# Altium PCB ALCT_MEZ_LX150T.PcbDoc (part 3 of 9)
Units mil, origin at the board's own origin, x right, y up, seen from the top; angles counter-clockwise.
Board outline 4101.98 x 5875.01 mil, 12 copper layers (Top Layer, Mid-Layer 1, +3V3, Mid-Layer 2, +1V2, Mid-Layer 4, +2V5, Mid-Layer 5, GND1, Mid-Layer 7, GND2, Bottom Layer), stack 64.7 mil thick; 378 components, 616 nets, 2492 pads, 1686 vias.
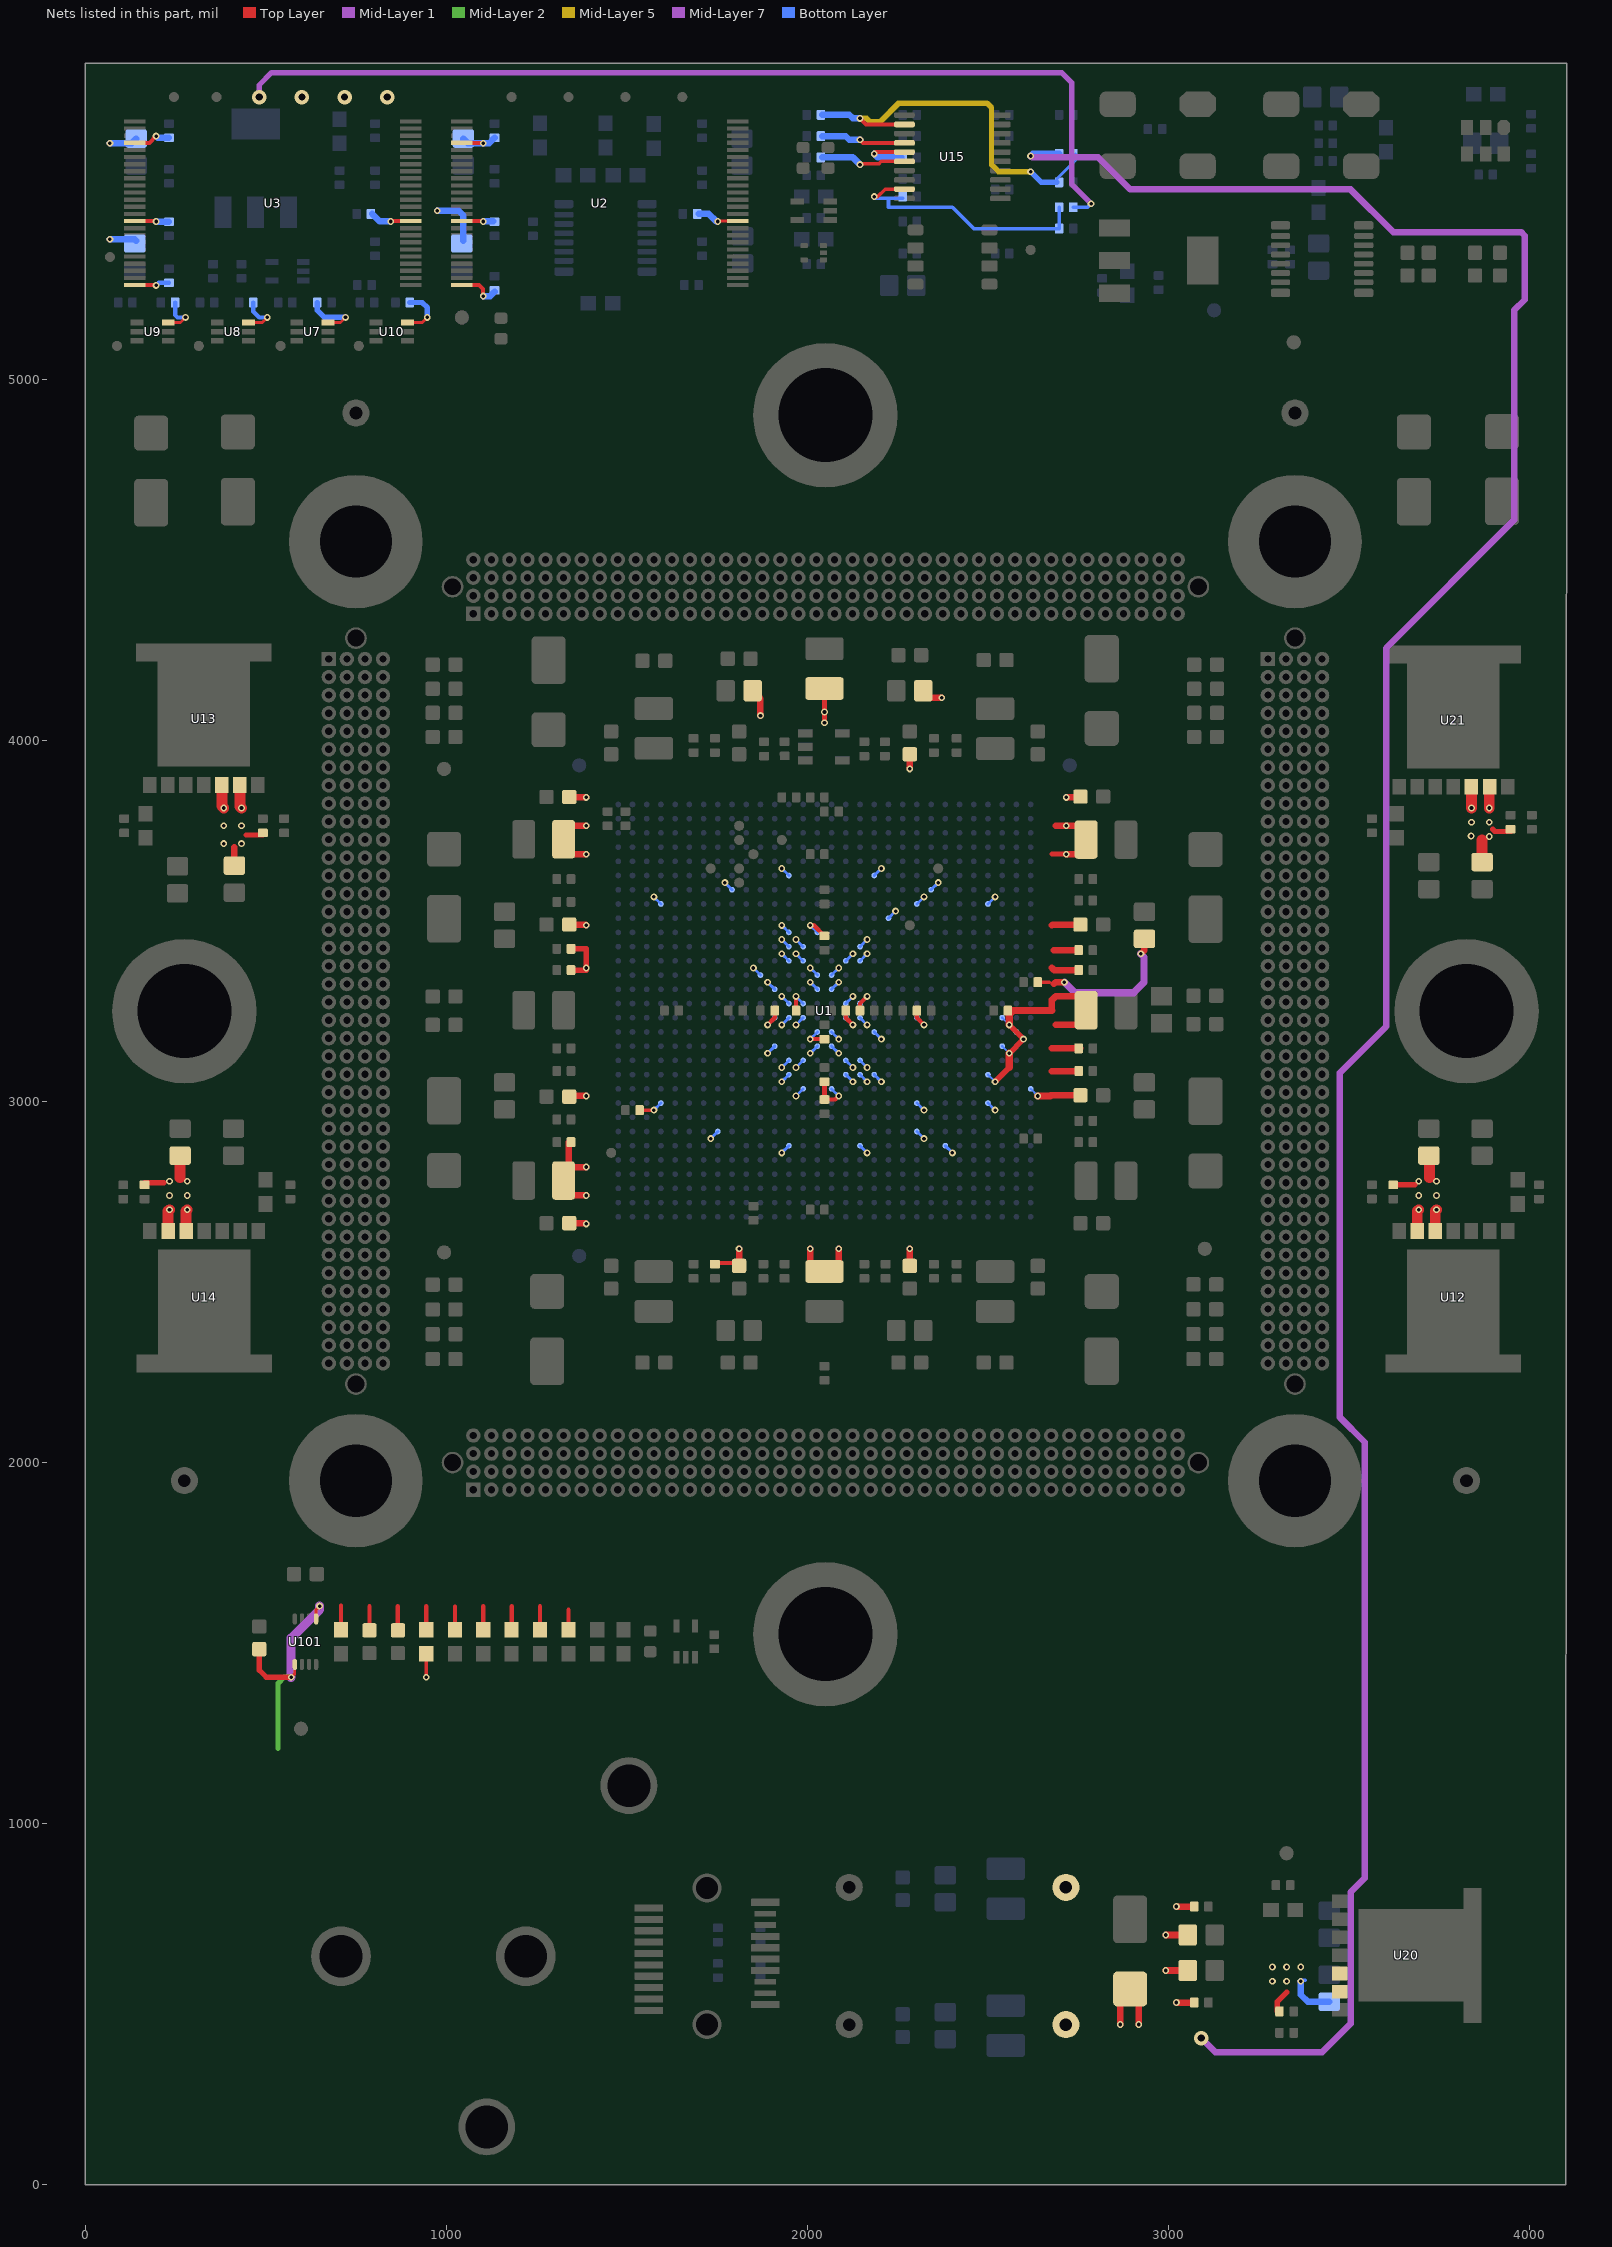
[diagram p12: the nets of this part, all layers, seen from the top]

## Part data (continued)
R50 R51 R52 R53: library part ERJ-2GE0R00X, "RES SMD 0.0OHM JUMPER 1/10W 0402", Manufacturer="Panasonic Electronic Components", Operating Temperature="-55°C ~ 155°C", Package / Case="0402 (1005 Metric)", Power (Watts)="0.1W, 1/10W", Resistance (Ohms)=0.0, Supplier Device Package=0402, Supplier Part Number 1=P0.0JCT-ND, Temperature Coefficient=-, Tolerance=Jumper, Category=Resistors, ComponentLink1Description=http://industrial.panasonic.com/www-cgi/jvcr13pz.cgi?E+PZ+3+AOA0001+ERJ2GE0R00X+7+WW, ComponentLink1URL=http://industrial.panasonic.com/www-cgi/jvcr13pz.cgi?E+PZ+3+AOA0001+ERJ2GE0R00X+7+WW, Composition="Thick Film", Failure Rate=-, Features="Automotive AEC-Q200", Height - Seated (Max)="0.016\" (0.40mm)", Manufacturer Part Number=ERJ-2GE0R00X, Number of Terminations=2, Packaging="Cut Tape (CT)", Part Status=Active, Pricing 1="1=0.1, 50=0.0138, 100=0.0105, 250=0.0078, 500=0.00576, 1000=0.00384, 5000=0.0027 (USD)", Pricing 2="1=0.1, 50=0.0138, 100=0.0105, 250=0.0078, 500=0.00576, 1000=0.00384, 5000=0.0027 (USD)", RoHS="RoHS Compliant", Size / Dimension="0.039\" L x 0.020\" W (1.00mm x 0.50mm)", Stock 1=3132025, Stock 2=3132025, Supplier 1=Digi-Key, Supplier 2=Digi-Key, Supplier Part Number 2=P0.0JDKR-ND
R80: library part ERA-6AEB49R9V, "RES SMD 49.9 OHM 0.1% 1/8W 0805", Manufacturer="Panasonic Electronic Components", Operating Temperature="-55°C ~ 155°C", Package / Case="0805 (2012 Metric)", Power (Watts)="0.125W, 1/8W", Resistance (Ohms)=49.9, Supplier Device Package=0805, Supplier Part Number 1=P49.9DACT-ND, Temperature Coefficient=±25ppm/°C, Tolerance=±0.1%, Category=Resistors, ComponentLink1Description=https://industrial.panasonic.com/cdbs/www-data/pdf/RDA0000/AOA0000C237.pdf, ComponentLink1URL=https://industrial.panasonic.com/cdbs/www-data/pdf/RDA0000/AOA0000C237.pdf, Composition="Thin Film", Failure Rate=-, Features="Automotive AEC-Q200", Height - Seated (Max)="0.024\" (0.60mm)", Manufacturer Part Number=ERA-6AEB49R9V, Number of Terminations=2, Packaging="Cut Tape (CT)", Part Status=Active, Pricing 1="1=0.53, 50=0.21, 100=0.162, 250=0.126, 500=0.0888, 1000=0.0648 (USD)", Pricing 2="1=0.53, 50=0.21, 100=0.162, 250=0.126, 500=0.0888, 1000=0.0648 (USD)", RoHS="RoHS Compliant", Size / Dimension="0.079\" L x 0.049\" W (2.00mm x 1.25mm)", Stock 1=51151, Stock 2=51151, Supplier 1=Digi-Key, Supplier 2=Digi-Key, Supplier Part Number 2=P49.9DADKR-ND
R100 R102: library part ERJ-3EKF1870V, "RES SMD 187 OHM 1% 1/10W 0603", Manufacturer="Panasonic Electronic Components", Operating Temperature="-55°C ~ 155°C", Package / Case="0603 (1608 Metric)", Power (Watts)="0.1W, 1/10W", Resistance (Ohms)=187, Supplier Device Package=0603, Supplier Part Number 1=P187HCT-ND, Temperature Coefficient=±100ppm/°C, Tolerance=±1%, Category=Resistors, ComponentLink1Description=http://industrial.panasonic.com/www-cgi/jvcr13pz.cgi?E+PZ+3+AOA0002+ERJ3EKF1870V+7+WW, ComponentLink1URL=http://industrial.panasonic.com/www-cgi/jvcr13pz.cgi?E+PZ+3+AOA0002+ERJ3EKF1870V+7+WW, Composition="Thick Film", Failure Rate=-, Features="Automotive AEC-Q200", Height - Seated (Max)="0.022\" (0.55mm)", Manufacturer Part Number=ERJ-3EKF1870V, Number of Terminations=2, Packaging="Cut Tape (CT)", Part Status=Active, Pricing 1="1=0.1, 10=0.019, 25=0.0136, 50=0.0104, 100=0.0077, 250=0.00584, 500=0.00468, 1000=0.00345 (USD)", Pricing 2="1=0.1, 10=0.019, 25=0.0136, 50=0.0104, 100=0.0077, 250=0.00584, 500=0.00468, 1000=0.00345 (USD)", RoHS="RoHS Compliant", Size / Dimension="0.063\" L x 0.031\" W (1.60mm x 0.80mm)", Stock 1=136341, Stock 2=136341, Supplier 1=Digi-Key, Supplier 2=Digi-Key, Supplier Part Number 2=P187HDKR-ND
SP1: library part SPlate_MC_S6
T1: library part "NET TIE VIA"
TPG1 TPG2 TPG3 TPG4: library part TPGND, Package=90, COMPGROUP=0, COMPROT=0, COMPSIDE=TOP, mfgr=Mill-Max, mfgr_foot=Turret, mfgr_id=2341, silk=What
U1: "Spartan-6 LXT 1.2V FPGA, 540 User I/Os, 900-Ball Chip-Scale BGA (1.0mm Pitch), Speed Grade 3, Commercial Grade, Pb-Free", Manufacturer="Xilinx Inc.", Operating Temperature="0°C ~ 85°C (TJ)", Package / Case=900-BBGA, Supplier Device Package="900-FBGA (31x31)", Supplier Part Number 1=XC6SLX150T-3FGG900C-ND, Voltage - Supply="1.14 V ~ 1.26 V", Category="Integrated Circuits (ICs)", Code_IPC=BGA100P30X30-900, Code_JEDEC=MS-034-AAN-1, ComponentLink1Description="Manufacturer URL", ComponentLink1URL=http://www.xilinx.com/, ComponentLink2Description="Spartan-6 Datasheet", ComponentLink2URL=http://www.xilinx.com/support/documentation/data_sheets/ds160.pdf, ComponentLink3Description="Spartan-6 Documents", ComponentLink3URL=http://www.xilinx.com/support/documentation/spartan-6.htm, ComponentLink4Description=http://www.xilinx.com/support/documentation/data_sheets/ds162.pdf, ComponentLink4URL=http://www.xilinx.com/support/documentation/data_sheets/ds162.pdf, DatasheetVersion="ver1.6, Nov-2010", Manufacturer Part Number=XC6SLX150T-3FGG900C, Mounting Type="Surface Mount", Number of I/O=540, PackageDescription="900-Ball Fine-Pitch Ball Grid Array (FGG900) - Pb-Free", PackageReference=FGG900, PackageVersion="ver1.4, Nov-2009", Part Status=Active, Pricing 1="27=287.3 (USD)", RoHS="RoHS Compliant", Stock 1=0, Supplier 1=Digi-Key
U2: "IC PROM SRL/PAR 1.8V 32M 48TSOP", Manufacturer="Xilinx Inc.", Operating Temperature="-40°C ~ 85°C", Package / Case="48-TFSOP (0.724\", 18.40mm Width)", Supplier Device Package=48-TSOP, Supplier Part Number 1=122-1458-ND, Voltage - Supply="1.65 V ~ 2 V", Category="Integrated Circuits (ICs)", COMPGROUP=0, ComponentLink1Description=http://www.xilinx.com/support/documentation/data_sheets/ds123.pdf, ComponentLink1URL=http://www.xilinx.com/support/documentation/data_sheets/ds123.pdf, COMPROT=270, COMPSIDE=TOP, Manufacturer Part Number=XCF32PVOG48C, Memory Size=32Mb, mfgr=Xilinx, mfgr_foot=VOG48, mfgr_id=XCF32PVOG48C, Packaging=Tube, Part Status=Active, Pricing 1="1=27.23 (USD)", Programmable Type="In System Programmable", RoHS="RoHS Compliant", Stock 1=1063, Supplier 1=Digi-Key
U3: "IC PROM SRL/PAR 1.8V 08M 48TSOP", Manufacturer="Xilinx Inc.", Operating Temperature="-40°C ~ 85°C", Package / Case="48-TFSOP (0.724\", 18.40mm Width)", Supplier Device Package=48-TSOP, Supplier Part Number 1=122-1454-ND, Voltage - Supply="1.65 V ~ 2 V", Category="Integrated Circuits (ICs)", ComponentLink1Description=http://www.xilinx.com/support/documentation/data_sheets/ds123.pdf, ComponentLink1URL=http://www.xilinx.com/support/documentation/data_sheets/ds123.pdf, Manufacturer Part Number=XCF08PVOG48C, Memory Size=8Mb, Packaging=Tube, Part Status=Active, Pricing 1="1=12.53 (USD)", Programmable Type="In System Programmable", RoHS="RoHS Compliant", Stock 1=978, Supplier 1=Digi-Key
U4: library part 74LVC161PW, "IC SYNC 4BIT BIN COUNTER 16TSSOP", Manufacturer="NXP USA Inc.", Operating Temperature="-40°C ~ 125°C", Package / Case="16-TSSOP (0.173\", 4.40mm Width)", Supplier Device Package=16-TSSOP, Supplier Part Number 1=568-7667-1-ND, Voltage - Supply="1.2 V ~ 3.6 V", Category="Integrated Circuits (ICs)", ComponentLink1Description=http://www.nxp.com/documents/data_sheet/74LVC161.pdf, ComponentLink1URL=http://www.nxp.com/documents/data_sheet/74LVC161.pdf, ComponentLink2Description=http://assets.nexperia.com/documents/data-sheet/74LVC161.pdf, ComponentLink2URL=http://assets.nexperia.com/documents/data-sheet/74LVC161.pdf, Count Rate=150MHz, Direction=Up, Logic Type="Binary Counter", Manufacturer Part Number=74LVC161PW,118, Mounting Type="Surface Mount", Number of Bits per Element=4, Number of Elements=1, Packaging="Cut Tape (CT)", Part Status=Active, Pricing 1="1=0.64, 10=0.561, 100=0.429, 500=0.3399, 1000=0.27225 (USD)", Pricing 2="1=0.64, 10=0.561, 100=0.429, 500=0.3399, 1000=0.27225 (USD)", Pricing 3="1=0.64, 10=0.561, 100=0.43, 500=0.3399, 1000=0.27192 (USD)", Pricing 4="1=0.64, 10=0.561, 100=0.43, 500=0.3399, 1000=0.27192 (USD)", Reset=Asynchronous, RoHS="RoHS Compliant", Stock 1=3261, Stock 2=3261, Stock 3=1164, Stock 4=1164, Supplier 1=Digi-Key, Supplier 2=Digi-Key, Supplier 3=Digi-Key, Supplier 4=Digi-Key, Supplier Part Number 2=568-7667-6-ND, Supplier Part Number 3=1727-5981-1-ND, Supplier Part Number 4=1727-5981-6-ND, Timing=Synchronous, Trigger Type="Positive Edge"
U5: "IC POR 2.88V 10% SOT223", Manufacturer="Maxim Integrated", Manufacturer Part Number=DS1233AZ-10+T&R, Operating Temperature="-40°C ~ 85°C (TA)", Package / Case="TO-261-4, TO-261AA", Supplier Device Package=SOT-223-3, Supplier Part Number 1=DS1233AZ-10+CT-ND, Voltage - Threshold=2.88V, Category="Integrated Circuits (ICs)", ComponentLink1Description=http://datasheets.maximintegrated.com/en/ds/DS1233A.pdf, ComponentLink1URL=http://datasheets.maximintegrated.com/en/ds/DS1233A.pdf, Mounting Type="Surface Mount", Output="Open Drain or Open Collector", Packaging="Cut Tape (CT)", Part Status=Active, Pricing 1="1=2.14, 10=2.015, 25=1.6116, 50=1.531, 100=1.4102, 250=1.33764, 500=1.28928 (USD)", Pricing 2="1=2.55, 10=2.423, 25=1.7, 50=1.615, 100=1.26, 250=1.197 (USD)", Pricing 3="1=2.14, 10=2.015, 25=1.6116, 50=1.531, 100=1.4102, 250=1.33764, 500=1.28928 (USD)", Reset="Active Low", Reset Timeout="250 ms Minimum", RoHS="RoHS Compliant", Stock 1=3429, Stock 2=2849, Stock 3=3429, Supplier 1=Digi-Key, Supplier 2=Digi-Key, Supplier 3=Digi-Key, Supplier Part Number 2=DS1233AZ-10+-ND, Supplier Part Number 3=DS1233AZ-10+DKR-ND, Type="Simple Reset/Power-On Reset"
U6 U100: "IC BUFF/DVR NON-INVERT Open Drain SC70-5", Current - Output High, Low="-, 32mA", Manufacturer="Texas Instruments", Manufacturer Part Number=SN74LVC1G07MDCKREP, Operating Temperature="-55°C ~ 125°C (TA)", Package=99, Package / Case="5-TSSOP, SC-70-5, SOT-353", Supplier Device Package=SC-70-5, Supplier Part Number 1=296-22343-1-ND, Voltage - Supply="1.65 V ~ 5.5 V", Category="Integrated Circuits (ICs)", COMPGROUP=0, ComponentLink1Description=http://www.ti.com/lit/ds/symlink/sn74lvc1g07-ep.pdf, ComponentLink1URL=http://www.ti.com/lit/ds/symlink/sn74lvc1g07-ep.pdf, COMPROT=270, COMPSIDE=TOP, Input Type=-, Logic Type="Buffer, Non-Inverting", mfgr="Texas Inst", mfgr_foot=DCK, mfgr_id=SN74LVC1G07MDCKREP, Mounting Type="Surface Mount", Number of Bits per Element=1, Output Type="Open Drain", Packaging="Cut Tape (CT)", Part Status=Active, Pricing 1="1=0.81, 10=0.714, 100=0.5472, 500=0.4326, 1000=0.34608 (USD)", Pricing 2="1=0.81, 10=0.714, 100=0.5472, 500=0.4326, 1000=0.34608 (USD)", RoHS="RoHS Compliant", Stock 1=4252, Stock 2=4252, Supplier 1=Digi-Key, Supplier 2=Digi-Key, Supplier Part Number 2=296-22343-6-ND
U7 U8 U9 U10: library part SN74LVC1T45-EP-ALCT_1, "IC BUS TRANSCVR TRI-ST SC70-6", Manufacturer="Texas Instruments", Operating Temperature="-40°C ~ 85°C (TA)", Package / Case="6-TSSOP, SC-88, SOT-363", Supplier Device Package=SC-70-6, Supplier Part Number 1=296-16844-1-ND, Category="Integrated Circuits (ICs)", Channels per Circuit=1, Channel Type=Bidirectional, COMPGROUP=0, ComponentLink1Description=http://www.ti.com/lit/ds/symlink/sn74lvc1t45.pdf, ComponentLink1URL=http://www.ti.com/lit/ds/symlink/sn74lvc1t45.pdf, COMPROT=270, COMPSIDE=TOP, Data Rate=420Mbps, Features=-, Input Signal=-, Manufacturer Part Number=SN74LVC1T45DCKR, mfgr="Texas Inst", mfgr_foot=DCK, mfgr_id=SN74LVC1T45MDCKREP, Mounting Type="Surface Mount", Output Signal=-, Output Type="Tri-State, Non-Inverted", Packaging="Cut Tape (CT)", Part Status=Active, Pricing 1="1=0.58, 10=0.494, 100=0.3692, 500=0.29004, 1000=0.22413 (USD)", Pricing 2="1=0.58, 10=0.494, 100=0.3692, 500=0.29004, 1000=0.22413 (USD)", RoHS="RoHS Compliant", Stock 1=91787, Stock 2=91787, Supplier 1=Digi-Key, Supplier 2=Digi-Key, Supplier Part Number 2=296-16844-6-ND, Translator Type="Voltage Level"
U11: library part DS2401_sot223, "IC Digital Serial Number", Manufacturer="Maxim Integrated", Manufacturer Part Number=DS2401Z+T&R, Package / Case="TO-261-4, TO-261AA", Supplier Device Package=SOT-223-3, Supplier Part Number 1=DS2401Z+T&RCT-ND, Applications="PCB, Network Node, Equipment Identification/Registration", Category="Integrated Circuits (ICs)", ComponentLink1Description=http://pdfserv.maximintegrated.com/en/ds/DS2401.pdf, ComponentLink1URL=http://pdfserv.maximintegrated.com/en/ds/DS2401.pdf, Mounting Type="Surface Mount", Packaging="Cut Tape (CT)", Part Status=Active, Pricing 1="1=2, 10=1.89, 25=1.51, 50=1.43, 100=1.32, 250=1.25, 500=1.21 (USD)", Pricing 2="1=2, 10=1.89, 25=1.51, 50=1.43, 100=1.32, 250=1.25, 500=1.21 (USD)", RoHS="RoHS Compliant", Stock 1=8136, Stock 2=8136, Supplier 1=Digi-Key, Supplier 2=Digi-Key, Supplier Part Number 2=DS2401Z+T&RDKR-ND, Type="Silicon Serial Number"
U12 U13 U14 U20 U21: "IC REG LDO ADJ 5A SPAK-7", Current - Output=5A, Manufacturer="Microchip Technology", Operating Temperature="-40°C ~ 125°C", Package / Case="SPak-7 (7 leads + Tab)", Supplier Device Package=S-PAK-7, Supplier Part Number 1=576-1613-ND, Voltage - Input (Max)=5.5V, Voltage - Output (Min/Fixed)=0.5V, Voltage Dropout (Max)="0.5V @ 5A", Category="Integrated Circuits (ICs)", ComponentLink1Description=http://www.microchip.com/mymicrochip/filehandler.aspx?ddocname=en580586, ComponentLink1URL=http://www.microchip.com/mymicrochip/filehandler.aspx?ddocname=en580586, Control Features=Enable, Manufacturer Part Number=MIC69502WR, Mounting Type="Surface Mount", Output Configuration=Positive, Output Type=Adjustable, Packaging=Tube, Part Status=Active, Pricing 1="1=2.98, 25=2.4884, 100=2.2575 (USD)", Protection Features="Over Current, Over Temperature", PSRR=-, RoHS="RoHS Compliant", Stock 1=2547, Supplier 1=Digi-Key, Voltage - Output (Max)=5.5V
U15: "IC SERIAL OUT A/D 11-CH 20-SSOP", Manufacturer="Texas Instruments", Manufacturer Part Number=TLV2543CDBR, Operating Temperature="0°C ~ 70°C", Package / Case="20-SSOP (0.209\", 5.30mm Width)", Supplier Device Package=20-SSOP, Supplier Part Number 1=296-10643-1-ND, Voltage - Supply, Analog="3 V ~ 3.6 V", Architecture=SAR, Category="Integrated Circuits (ICs)", COMPGROUP=0, ComponentLink1Description=http://www.ti.com/lit/ds/symlink/tlv2543.pdf, ComponentLink1URL=http://www.ti.com/lit/ds/symlink/tlv2543.pdf, COMPROT=270, COMPSIDE=TOP, Configuration=MUX-S/H-ADC, Data Interface=SPI, Features=-, Input Type="Single Ended", mfgr="Texas Inst", mfgr_foot=DB20, mfgr_id=TLV2543CDB, Number of A/D Converters=1, Number of Bits=12, Number of Inputs=11, Packaging="Cut Tape (CT)", Part Status=Active, Pricing 1="1=12.64, 10=11.596, 100=9.7894, 500=8.68224, 1000=7.98299 (USD)", Pricing 2="1=12.64, 10=11.596, 100=9.7894, 500=8.68224, 1000=7.98299 (USD)", Ratio - S/H:ADC=1:1, Reference Type=External, RoHS="RoHS Compliant", Sampling Rate (Per Second)=66k, Stock 1=505, Stock 2=505, Supplier 1=Digi-Key, Supplier 2=Digi-Key, Supplier Part Number 2=296-10643-6-ND, Voltage - Supply, Digital="3 V ~ 3.6 V"
U16: library part LT1634_2.5V, "IC VREF SHUNT 2.5V 8SOIC", Current - Cathode=8µA, Current - Output=50mA, Current - Supply=-, Manufacturer="Linear Technology", Manufacturer Part Number=LT1634ACS8-2.5#PBF, Operating Temperature="0°C ~ 70°C (TA)", Package / Case="8-SOIC (0.154\", 3.90mm Width)", Supplier Device Package=8-SOIC, Supplier Part Number 1=LT1634ACS8-2.5#PBF-ND, Temperature Coefficient=10ppm/°C, Tolerance=±0.05%, Voltage - Output (Min/Fixed)=2.5V, Category="Integrated Circuits (ICs)", COMPGROUP=0, ComponentLink1Description=http://www.linear.com/docs/3209, ComponentLink1URL=http://www.linear.com/docs/3209, COMPROT=270, COMPSIDE=TOP, mfgr="Linear Tech", mfgr_foot=SOIC8, mfgr_id=LT1634ACS8-2.5, Mounting Type="Surface Mount", Noise - 0.1Hz to 10Hz=15µVp-p, Noise - 10Hz to 10kHz=-, Output Type=Fixed, Packaging=Tube, Part Status=Active, Pricing 1="1=9.42, 25=6.256, 100=4.7109 (USD)", Reference Type=Shunt, RoHS="RoHS Compliant", Stock 1=1010, Supplier 1=Digi-Key, Voltage - Input=-, Voltage - Output (Max)=-
U17: library part SN74LVC1G34DRLR, "IC BUFFER NON-INVERT SOT5", Current - Output High, Low="32mA, 32mA", Manufacturer="Texas Instruments", Operating Temperature="-40°C ~ 125°C (TA)", Package=99, Package / Case=SOT-553, Supplier Device Package=SOT-5, Supplier Part Number 1=296-18017-1-ND, Voltage - Supply="1.65 V ~ 5.5 V", Category="Integrated Circuits (ICs)", COMPGROUP=0, ComponentLink1Description=http://www.ti.com/lit/ds/symlink/sn74lvc1g34.pdf, ComponentLink1URL=http://www.ti.com/lit/ds/symlink/sn74lvc1g34.pdf, COMPROT=270, COMPSIDE=TOP, Input Type=-, Logic Type="Buffer, Non-Inverting", Manufacturer Part Number=SN74LVC1G34DRLR, mfgr="Texas Inst", mfgr_foot=DRL, mfgr_id=SN74LVC1G34DRLR, Mounting Type="Surface Mount", Number of Bits per Element=1, Output Type=Push-Pull, Packaging="Cut Tape (CT)", Part Status=Active, Pricing 1="1=0.48, 10=0.387, 100=0.2637, 500=0.19776, 1000=0.14832 (USD)", Pricing 2="1=0.48, 10=0.387, 100=0.2637, 500=0.19776, 1000=0.14832 (USD)", RoHS="RoHS Compliant", Stock 1=1633, Stock 2=1633, Supplier 1=Digi-Key, Supplier 2=Digi-Key, Supplier Part Number 2=296-18017-6-ND
U18 U19: "SENSOR TEMP ANLG VOLT SOT-23-5", Case/Package=SOT-23, Manufacturer="Analog Devices", Manufacturer Part Number=TMP36GRTZ-REEL7, Max Operating Temperature=125°C, Max Supply Voltage=5.5V, Min Operating Temperature=-40°C, Min Supply Voltage=2.7V, Nominal Supply Current=50uA, Package Quantity=3000, Supplier Part Number 1=TMP36GRTZ-REEL7CT-ND, ComponentLink1Description=http://www.analog.com/media/en/technical-documentation/data-sheets/TMP35_36_37.pdf, ComponentLink1URL=http://www.analog.com/media/en/technical-documentation/data-sheets/TMP35_36_37.pdf, Height=1.3mm, Interface=Analog, Lead Free="Contains Lead", Length=3mm, Number of Pins=5, Operating Supply Current=50uA, Output Current=50uA, Output Type=Analog, Packaging="Tape and Reel", Pricing 1="1=1.75, 10=1.574, 100=1.2652, 500=1.0395, 1000=0.8613 (USD)", Radiation Hardening=No, REACH SVHC="No SVHC", Stock 1=18393, Supplier 1=Digi-Key, Width=1.7mm
U40: "IC INVERTER LP 5TSSOP", Current - Output High, Low="4mA, 4mA", Manufacturer="Nexperia USA Inc.", Manufacturer Part Number=74AUP1G04GW,125, Operating Temperature="-40°C ~ 125°C", Package / Case="5-TSSOP, SC-70-5, SOT-353", Supplier Device Package=5-TSSOP, Supplier Part Number 1=1727-3176-1-ND, Voltage - Supply="0.8 V ~ 3.6 V", Category="Integrated Circuits (ICs)", ComponentLink1Description=http://assets.nexperia.com/documents/data-sheet/74AUP1G04.pdf, ComponentLink1URL=http://assets.nexperia.com/documents/data-sheet/74AUP1G04.pdf, Features=-, Logic Level - High="1.6 V ~ 2 V", Logic Level - Low="0.7 V ~ 0.9 V", Logic Type=Inverter, Max Propagation Delay @ V, Max CL="5.4ns @ 3.3V, 30pF", Mounting Type="Surface Mount", Number of Inputs=1, Packaging="Cut Tape (CT)", Part Status=Active, Pricing 1="1=0.41, 10=0.311, 100=0.1938, 500=0.13258, 1000=0.10198 (USD)", Pricing 2="1=0.41, 10=0.311, 100=0.1938, 500=0.13258, 1000=0.10198 (USD)", RoHS="RoHS Compliant", Stock 1=16264, Stock 2=16264, Supplier 1=Digi-Key, Supplier 2=Digi-Key, Supplier Part Number 2=1727-3176-6-ND
U80: library part DS90LV047ATMTCX, "IC LINE DVR 3V QUAD DIFF 16TSSOP", Case/Package=TSSOP, Manufacturer="TI National Semiconductor", Max Operating Temperature=85°C, Max Power Dissipation=866mW, Max Supply Current=20mA, Max Supply Voltage=3.6V, Min Operating Temperature=-40°C, Min Supply Voltage=3V, Operating Supply Current=30mA, Operating Supply Voltage=3.3V, Power Consumption=14W, Supplier Part Number 1=DS90LV047ATMTCX/NOPBDKR-ND, ComponentLink1Description=https://datasheet.ciiva.com/12096/snls044b-72207-12096627.pdf, ComponentLink1URL=https://datasheet.ciiva.com/12096/snls044b-72207-12096627.pdf, ComponentLink2Description=https://datasheet.ciiva.com/3151/ds90lv047a-3151495.pdf, ComponentLink2URL=https://datasheet.ciiva.com/3151/ds90lv047a-3151495.pdf, ComponentLink3Description=https://datasheet.ciiva.com/6635/ds90lv047a-6635303.pdf, ComponentLink3URL=https://datasheet.ciiva.com/6635/ds90lv047a-6635303.pdf, ComponentLink4Description=https://datasheet.ciiva.com/6635/ds90lv047a-6635304.pdf, ComponentLink4URL=https://datasheet.ciiva.com/6635/ds90lv047a-6635304.pdf, ComponentLink5Description=https://datasheet.ciiva.com/6635/ds90lv047a-6635305.pdf, ComponentLink5URL=https://datasheet.ciiva.com/6635/ds90lv047a-6635305.pdf, ComponentLink6Description=https://datasheet.ciiva.com/15133/getdatasheetpartid-55660-15133789.pdf, ComponentLink6URL=https://datasheet.ciiva.com/15133/getdatasheetpartid-55660-15133789.pdf, Data Rate=400Mbps, Lead Free="Lead Free", Manufacturer Part Number=DS90LV047ATMTCX/NOPB, Mount="Surface Mount", Number of Channels=4, Number of Drivers=4, Number of Elements=4, Number of Pins=16, Number of Receivers=4, Packaging="Tape and Reel", Power Dissipation=866mW, Pricing 1="1=2.91, 10=2.618, 100=2.104, 500=1.7286, 1000=1.43227 (USD)", Propagation Delay=1.7ns, Radiation Hardening=No, REACH SVHC="No SVHC", Stock 1=29207, Supplier 1=Digi-Key, Turn-On Delay Time=1.7ns, Weight=0.002222oz
U101: "IC TRNSLTR BIDIRECTIONAL 8VSSOP", Base Part Number=74LVC2T45, Manufacturer="Nexperia USA Inc.", Operating Temperature="-40°C ~ 125°C (TA)", Package / Case="8-VFSOP (0.091\", 2.30mm Width)", Supplier Device Package=8-VSSOP, Supplier Part Number 1=1727-4578-6-ND, Category="Integrated Circuits (ICs)", Channels per Circuit=2, Channel Type=Bidirectional, ComponentLink1Description=https://assets.nexperia.com/documents/data-sheet/74LVC_LVCH2T45.pdf, ComponentLink1URL=https://assets.nexperia.com/documents/data-sheet/74LVC_LVCH2T45.pdf, Data Rate=420Mbps, Features=-, Input Signal=-, Manufacturer Part Number=74LVC2T45DC,125, Mounting Type="Surface Mount", Output Signal=-, Output Type="Tri-State, Non-Inverted", Packaging=Digi-Reel®, Part Status=Active, Pricing 1="1=0.58, 10=0.51, 100=0.3909, 500=0.309, 1000=0.2472 (USD)", RoHS="RoHS Compliant", Stock 1=2495, Supplier 1=Digi-Key, Translator Type="Voltage Level"
X1: "OSC 80.0000MHZ LVDS SMD", Current - Supply (Disable) (Max)=20mA, Current - Supply (Max)=30mA, Frequency=80MHz, Frequency Stability=±30ppm, Manufacturer=EPSON, Operating Temperature="-40°C ~ 85°C", Package / Case="6-SMD, No Lead (DFN, LCC)", Ratings=-, Supplier Part Number 1=SER3935CT-ND, Voltage - Supply="2.5 V ~ 3.3 V", Category="Crystals, Oscillators, Resonators", ComponentLink1Description=https://support.epson.biz/td/api/doc_check.php?dl=brief_SG3225EAN_en.pdf, ComponentLink1URL=https://support.epson.biz/td/api/doc_check.php?dl=brief_SG3225EAN_en.pdf, Function=Enable/Disable, Height - Seated (Max)="0.047\" (1.20mm)", Manufacturer Part Number="SG3225VAN 80.000000M-KEGA3", Mounting Type="Surface Mount", Output=LVDS, Packaging="Cut Tape (CT)", Part Status=Active, Pricing 1="1=2.29, 10=2.241, 50=2.134, 100=1.8673 (USD)", Pricing 2="1=2.29, 10=2.241, 50=2.134, 100=1.8673 (USD)", RoHS="RoHS Compliant", Size / Dimension="0.126\" L x 0.098\" W (3.20mm x 2.50mm)", Stock 1=107, Stock 2=107, Supplier 1=Digi-Key, Supplier 2=Digi-Key, Supplier Part Number 2=SER3935DKR-ND, Type="XO (Standard)"
X2: "XTAL, 33MHz, CMOS", Current - Supply (Disable) (Max)=10µA, Current - Supply (Max)=20mA, Frequency=33MHz, Frequency Stability=±20ppm, Manufacturer="Abracon LLC", Operating Temperature="-20°C ~ 70°C", Package / Case="4-SMD, No Lead", Ratings=-, Supplier Part Number 1=535-9324-6-ND, Voltage - Supply=3.3V, Category="Crystals, Oscillators, Resonators", ComponentLink1Description=http://www.abracon.com/Oscillators/ASV.pdf, ComponentLink1URL=http://www.abracon.com/Oscillators/ASV.pdf, Function=Enable/Disable, Height - Seated (Max)="0.071\" (1.80mm)", Manufacturer Part Number=ASV-33.000MHZ-EJ-T, Mounting Type="Surface Mount", Output=HCMOS, Packaging=Digi-Reel®, Part Status=Active, Pricing 1="1=1.73, 10=1.656, 50=1.617, 100=1.386, 500=1.3475 (USD)", RoHS="RoHS Compliant", Size / Dimension="0.276\" L x 0.200\" W (7.00mm x 5.08mm)", Stock 1=9939, Supplier 1=Digi-Key, Type="XO (Standard)"
X3: library part LFSPXO009441, "XTAL, 80MHz, CMOS", Case/Package=CSMD, Frequency=80MHz, Frequency Stability=50ppm, Load Capacitance=30pF, Manufacturer=IQD, Manufacturer Part Number=LFSPXO009441REEL, Max Operating Temperature=70°C, Min Operating Temperature=0°C, Supplier Part Number 1=1923-1130-6-ND, ComponentLink1Description=http://components.arrow.com/part/dataview/0323_02291251, ComponentLink1URL=http://components.arrow.com/part/dataview/0323_02291251, Depth=5.2mm, Length=7.2mm, Number of Pins=4, Packaging="Tape and Reel", Pricing 1="1=2.72, 10=2.657, 50=2.53, 100=2.2138, 500=2.1505 (USD)", Stock 1=827, Supplier 1=Digi-Key
XP1: Manufacturer=SAMTEC, Manufacturer Part Number=MOLC-140-01-L-Q-LC, Package=XP1, Supplier Part Number 1=2732055, COMPGROUP=0, ComponentLink1Description=http://www.farnell.com/cad/2261282.pdf, ComponentLink1URL=http://www.farnell.com/cad/2261282.pdf, ComponentLink2Description=http://www.farnell.com/datasheets/2261038.pdf, ComponentLink2URL=http://www.farnell.com/datasheets/2261038.pdf, COMPROT=180, COMPSIDE=TOP, Contact Material="Phosphor Bronze", Contact Plating="Gold Plated Contacts", Contact Termination Type="Through Hole", Gender=Header, mfgr=Samtec, mfgr_foot=40x4, mfgr_id=MOLC-140-01-S-Q-LC, No. of Contacts=160, No. of Rows=4, Pitch Spacing=1.27, Pricing 1="1=18.16, 3=17.11, 5=16.18, 10=15.35, 15=14.96, 25=14.34 (GBP)", Product Range="MOLC Series", RoHS=YES, Stock 1=0, Supplier 1=Farnell, SVHC="No SVHC (12-Jan-2017"
XP2: Manufacturer=SAMTEC, Manufacturer Part Number=MOLC-140-01-L-Q-LC, Package=XP2, Supplier Part Number 1=2732055, COMPGROUP=0, ComponentLink1Description=http://www.farnell.com/cad/2261282.pdf, ComponentLink1URL=http://www.farnell.com/cad/2261282.pdf, ComponentLink2Description=http://www.farnell.com/datasheets/2261038.pdf, ComponentLink2URL=http://www.farnell.com/datasheets/2261038.pdf, COMPROT=270, COMPSIDE=TOP, Contact Material="Phosphor Bronze", Contact Plating="Gold Plated Contacts", Contact Termination Type="Through Hole", Gender=Header, mfgr=Samtec, mfgr_foot=40x4, mfgr_id=MOLC-140-01-S-Q-LC, No. of Contacts=160, No. of Rows=4, Pitch Spacing=1.27, Pricing 1="1=18.16, 3=17.11, 5=16.18, 10=15.35, 15=14.96, 25=14.34 (GBP)", Product Range="MOLC Series", RoHS=YES, Stock 1=0, Supplier 1=Farnell, SVHC="No SVHC (12-Jan-2017"
XP3: Manufacturer=SAMTEC, Manufacturer Part Number=MOLC-140-01-L-Q-LC, Package=XP3, Supplier Part Number 1=2732055, COMPGROUP=0, ComponentLink1Description=http://www.farnell.com/cad/2261282.pdf, ComponentLink1URL=http://www.farnell.com/cad/2261282.pdf, ComponentLink2Description=http://www.farnell.com/datasheets/2261038.pdf, ComponentLink2URL=http://www.farnell.com/datasheets/2261038.pdf, COMPROT=270, COMPSIDE=TOP, Contact Material="Phosphor Bronze", Contact Plating="Gold Plated Contacts", Contact Termination Type="Through Hole", Gender=Header, mfgr=Samtec, mfgr_foot=40x4, mfgr_id=MOLC-140-01-S-Q-LC, No. of Contacts=160, No. of Rows=4, Pitch Spacing=1.27, Pricing 1="1=18.16, 3=17.11, 5=16.18, 10=15.35, 15=14.96, 25=14.34 (GBP)", Product Range="MOLC Series", RoHS=YES, Stock 1=0, Supplier 1=Farnell, SVHC="No SVHC (12-Jan-2017"
XP4: Manufacturer=SAMTEC, Manufacturer Part Number=MOLC-140-01-L-Q-LC, Package=XP4, Supplier Part Number 1=2732055, COMPGROUP=0, ComponentLink1Description=http://www.farnell.com/cad/2261282.pdf, ComponentLink1URL=http://www.farnell.com/cad/2261282.pdf, ComponentLink2Description=http://www.farnell.com/datasheets/2261038.pdf, ComponentLink2URL=http://www.farnell.com/datasheets/2261038.pdf, COMPROT=180, COMPSIDE=TOP, Contact Material="Phosphor Bronze", Contact Plating="Gold Plated Contacts", Contact Termination Type="Through Hole", Gender=Header, mfgr=Samtec, mfgr_foot=40x4, mfgr_id=MOLC-140-01-S-Q-LC, No. of Contacts=160, No. of Rows=4, Pitch Spacing=1.27, Pricing 1="1=18.16, 3=17.11, 5=16.18, 10=15.35, 15=14.96, 25=14.34 (GBP)", Product Range="MOLC Series", RoHS=YES, Stock 1=0, Supplier 1=Farnell, SVHC="No SVHC (12-Jan-2017"
ZI1 ZI2 ZI3 ZI4 ZI5 ZI6 ZI7 ZI8 ZI9 ZI10 ZI11 ZI12: library part Fiducial_dot, Package=90, COMPGROUP=0, COMPROT=0, COMPSIDE=TOP, mfgr=Layout, mfgr_foot=FID, mfgr_id=FID
H12 H31 H34 H42: COMPGROUP=0, COMPROT=0, COMPSIDE=TOP, mfgr=McMaster, mfgr_foot="6-32 ButtonSkt", mfgr_id=92949A146

## Via types
v1: diameter 19, hole 10, Top Layer to Bottom Layer, tented both sides, 1667 vias
v2: diameter 40, hole 20, Top Layer to Bottom Layer, 12 vias
v3: diameter 19, hole 10, Top Layer to Bottom Layer, 7 vias

## Nets (pads, with @x,y where several pads share a name; then routed paths per layer and width w, separated by ;. In a path a pad name is that pad's centre, name@x,y a point inside that pad or via, vN(x,y) a via of type N, cw(c..) or ccw(c..) an arc to the next point about the centre after c; other vN are vias at no path point)
+1.5V: C107.1 C108.2 R100.2 R102.1 R103.1 R104.1 R105.1 R106.1 R108.1 | length 585.5
  Top Layer w12: R108.1@708.66,1537.6 708.66,1604.53 ; C107.1@787.4,1535.64 787.4,1602.56 ; C108.2@866.14,1535.64 866.14,1602.56 ; R102.1@944.88,1537.6 944.88,1602.56 ; R100.2@1024.41,1537.6 1024.41,1601.78 ; R105.1@1102.36,1537.6 1102.36,1602.56 ; R106.1@1181.1,1537.6 1181.1,1602.56 ; R104.1@1259.84,1537.6 1259.84,1602.56 ; R103.1@1330.71,1537.6 R103.1@1334.65,1533.67 ; R103.1@1338.58,1537.6 1338.58,1592.72
+1V2: 1V2_INT.1 C12.1 C24.1 C271.1 C272.1 C273.1 C274.1 C275.1 C276.1 C371.1 C372.1 C373.1 C374.1 C375.1 C471.1 C472.1 R7.1 R102.2 U1.N11 U1.N12 U1.N15 U1.N16 U1.N19 U1.N20 U1.P11 U1.P12 U1.P15 U1.P16 U1.P19 U1.R13 U1.R14 U1.R17 U1.R18 U1.T13 U1.T14 U1.T17 U1.T18 U1.U12 U1.U15 U1.U16 U1.U19 U1.U20 U1.V11 U1.V12 U1.V15 U1.V16 U1.V19 U1.V20 U14.5 U14.6 U15.5 | length 2260.8
  Top Layer w10: v1(944.88,1405.56) R102.2@944.88,1460.67
  Top Layer w11: v1(2185.04,5623.43) 2189.96,5628.35 U15.5@2268.7,5628.35
  Top Layer w12: C272.1@1968.5,3251.38 v1(1968.51,3290.75) ; v1(2007.88,3172.63) C273.1@2047.24,3172.64 ; C271.1@2106.3,3251.38 2106.3,3231.7 v1(2125.99,3212) ; C274.1@2145.67,3251.38 2145.67,3271.06 v1(2165.36,3290.75)
  Top Layer w15: R7.1@164.81,2775.01 217.96,2775.01 ; C275.1@1345.49,3363.59 1387.8,3363.59 v1(1387.8,3369.49) 1387.8,3422.64 C276.1@1345.49,3422.64
  Top Layer w18: C373.1@1340.55,3843.12 1341.73,3841.93 v1(1387.8,3841.93) ; C374.1@1342.52,3488.79 1386.61,3488.79 v1(1387.8,3487.6) ; v1(1387.8,3684.45) 1322.83,3684.45 1322.83,3763.19 v1(1387.8,3763.19) ; v1(2007.87,2591.93) 2007.87,2528.16 2086.61,2528.16 v1(2086.61,2591.93) ; C372.1@2283.46,2546.87 v1(2283.46,2591.93) ; v1(2283.46,3920.68) C371.1@2283.46,3961.23 ; C375.1@2320.87,4137.21 2340.55,4117.53 v1(2372.05,4117.53)
  Top Layer w30: U14.6@229.77,2641.15 229.77,2696.27 v1(233.71,2700.2) ; 263.24,2788.79 C12.1@263.24,2849.81 ; U14.5@279.77,2641.15 279.77,2697.05 v1(282.92,2700.2)
  Bottom Layer w8: v1(1929.14,3054.53) U1.V11@1948.82,3074.22 ; v1(1929.14,3093.9) U1.V12@1948.82,3113.59 ; v1(1929.14,3212) U1.V15@1948.82,3231.7 ; v1(1929.14,3290.75) U1.V16@1948.82,3271.07 ; v1(1929.15,3408.84) U1.V19@1948.82,3389.18 ; v1(1929.15,3448.19) U1.V20@1948.83,3428.52 ; v1(1968.51,3093.9) U1.U12@1988.19,3113.59 ; v1(1968.51,3212) U1.U15@1988.19,3231.7 ; v1(1968.51,3290.75) U1.U16@1988.19,3271.07 ; v1(1968.52,3408.84) U1.U19@1988.19,3389.18 ; v1(1968.52,3448.19) U1.U20@1988.19,3428.52 ; v1(2007.88,3133.27) U1.T13@2027.56,3152.96 ; v1(2007.88,3172.63) U1.T14@2027.56,3192.32 ; v1(2007.88,3330.12) U1.T17@2027.56,3310.44 ; v1(2007.88,3369.48) U1.T18@2027.56,3349.81 ; U1.R13@2066.93,3152.96 v1(2086.63,3133.27) ; U1.R14@2066.94,3192.32 v1(2086.63,3172.63) ; U1.R17@2066.93,3310.44 v1(2086.63,3330.12) ; U1.R18@2066.93,3349.81 v1(2086.63,3369.48) ; U1.P11@2106.3,3074.22 v1(2125.99,3054.53) ; U1.P12@2106.3,3113.59 v1(2125.99,3093.9) ; U1.P15@2106.3,3231.7 v1(2125.99,3212) ; U1.P16@2106.3,3271.07 v1(2125.99,3290.75) ; U1.P19@2106.3,3389.18 v1(2125.99,3408.84) ; U1.N11@2145.68,3074.22 v1(2165.36,3054.53) ; U1.N12@2145.68,3113.58 v1(2165.36,3093.9) ; U1.N15@2145.68,3231.68 v1(2165.36,3212) ; U1.N16@2145.68,3271.07 v1(2165.36,3290.75) ; U1.N19@2145.68,3389.17 v1(2165.35,3408.84) ; U1.N20@2145.68,3428.52 v1(2165.35,3448.19)
  Bottom Layer w18: v1(2185.04,5623.43) 2194.88,5613.59 C24.1@2259.84,5613.59
  other v1: 233.71,2739.57 282.92,2739.57 233.71,2778.94 282.92,2778.94
  other v2: 718.5,5780.91
+1V2_MGT: 1V2_MGT.1 C15.1 C25.1 C86.1 C87.1 C88.1 C89.1 C90.1 C91.1 C92.1 C93.1 C94.1 C95.1 C96.1 R10.1 T1.2 U1.A10 U1.B14 U1.C13 U1.C15 U1.D11 U15.6 U21.5 U21.6 | length 2435.1
  Top Layer w10: v1(2145.67,5593.9) 2147.44,5595.67 2197.63,5595.67 2204.72,5602.76 U15.6@2268.7,5602.76 ; C96.1@2641.73,3330.12 2669.29,3330.12 ; 2672.24,3015.16 2674.21,3017.13
  Top Layer w14: 2677.17,3684.45 v1(2716.54,3684.45)
  Top Layer w15: v1(2559.06,3133.27) v1(2598.43,3172.64) 2568.9,3202.17 ; 3897.64,3753.35 3903.54,3747.45 R10.1@3946.85,3747.45
  Top Layer w16: v1(2519.69,3054.53) 2559.06,3093.9
  Top Layer w18: 2674.21,3017.13 C88.1@2755.84,3017.13 C88.1@2755.91,3017.13 ; 2676.18,3147.05 C91.1@2750.97,3147.05 C91.1@2755.91,3147.05 ; 2677.17,3084.06 C95.1@2750.97,3084.06 C95.1@2751.97,3084.06 ; 2677.17,3251.38 2677.17,3280.91 2687.01,3290.75 2771.65,3290.75 C87.1@2771.65,3252.56 2771.65,3212.01 2687.01,3212.01 ; 2677.17,3369.49 2683.07,3363.59 C92.1@2750.97,3363.59 ; 2677.17,3487.6 2679.13,3489.57 C89.1@2755.84,3489.57 C89.1@2755.91,3489.57 ; 2682.09,3325.2 2687.01,3330.12 v1(2711.61,3330.12) ; 2682.09,3418.71 C93.1@2750.97,3418.71 ; 2687.01,3763.19 v1(2716.54,3763.19) 2771.65,3763.19 C86.1@2771.65,3725.01 2771.65,3684.45 v1(2716.54,3684.45) ; v1(2923.23,3408.86) 2933.07,3418.71 C90.1@2933.07,3450.2 C90.1@2932.35,3449.49
  Top Layer w20: 2559.06,3093.9 v1(2559.06,3133.27) ; v1(2559.06,3212) 2559.06,3241.55 2568.9,3251.38 2677.17,3251.38 ; v1(2637.78,3015.16) 2672.24,3015.16
  Top Layer w30: v1(3838.58,3812.41) U21.5@3838.58,3871.46 ; C15.1@3868.11,3662.8 3868.11,3723.82 ; v1(3887.8,3812.41) 3887.8,3870.67 U21.6@3888.58,3871.46
  Mid-Layer 7 w20: v1(2711.61,3330.12) 2741.14,3300.6 2903.54,3300.6 2903.54,3301.38 T1.2@2932.28,3330.12 2932.28,3399.81 v1(2923.23,3408.86)
  Bottom Layer w6: U1.D11@2500,3074.22 v1(2519.69,3054.53) v1@2519.88,3054.34 ; U1.C13@2539.38,3152.95 v1(2559.06,3133.27) ; U1.C15@2539.38,3231.68 v1(2559.06,3212) ; U1.B14@2578.74,3192.3 v1(2598.43,3172.64) ; U1.A10@2618.11,3034.85 v1(2637.78,3015.16)
  Bottom Layer w18: C25.1@2041.34,5613.59 2125.98,5613.59 v1(2145.67,5593.9)
  other v1: 3887.8,3733.67 3837.8,3734.85 3838.58,3773.04 3887.8,3773.04
  other v2: 836.61,5780.91
+1V8: 1V8.1 C7.1 C23.1 C55.1 C56.1 C57.1 C58.1 C66.1 C67.1 C68.1 C69.1 C117.1 R4.1 U2.4 U2.15 U2.34 U3.4 U3.15 U3.34 U13.5 U13.6 U15.4 U101.1 U101.5 | length 1952.5
  Top Layer w8: v1@195.67,5437.6 v1(196.85,5436.42) ; v1(570.87,1405.71) 580.71,1415.56 U101.1@580.71,1441.15 ; U101.5@639.76,1567.13 639.76,1592.72 v1(649.61,1602.56) ; v1(846.46,5436.42) v1@847.64,5437.6 ; U2.15@1043.31,5436.42 1074.8,5436.42 ; v1@1101.18,5654.14 v1(1102.36,5652.96) ; v1@1748.04,5436.43 1749.21,5437.6 U2.34@1807.09,5437.6
  Top Layer w10: v1@1101.18,5437.6 v1(1102.36,5436.42)
  Top Layer w11: U3.15@137.8,5437.6 v1@195.67,5437.6 ; U3.4@137.8,5654.14 178.35,5654.14 v1(196.85,5672.64) ; v1@847.64,5437.6 U3.34@901.57,5437.6 ; U2.15@1043.31,5437.6 v1@1101.18,5437.6 ; U2.4@1043.31,5654.14 v1@1101.18,5654.14 ; v1(2145.67,5662.8) 2154.53,5653.94 U15.4@2268.7,5653.94
  Top Layer w11.81: 476.38,3736.42 R4.1@492.13,3736.42
  Top Layer w15: 446.85,3737.6 R4.1@492.13,3737.6 ; C117.1@482.28,1483.27 482.28,1425.4 501.97,1405.71 v1(570.87,1405.71)
  Top Layer w18: C7.1@413.39,3652.96 413.39,3704.14
  Top Layer w30: U13.5@378.74,3876.19 378.74,3817.53 v1(383.86,3812.41) ; U13.6@428.74,3876.19 428.74,3816.74 v1(433.07,3812.41)
  Mid-Layer 2 w15: 534.12,1209.65 534.12,1389.03 550.81,1405.71 v1(570.87,1405.71)
  Mid-Layer 7 w25: v1(570.87,1405.71) 570.87,1513.98 649.61,1592.72 v1(649.61,1602.56)
  Bottom Layer w18: v1(68.9,5652.96) 128.74,5652.96 C69.1@141.73,5665.95 ; v1(196.85,5436.42) 197.64,5435.64 C57.1@232.28,5435.64 ; v1(196.85,5672.64) 201.57,5667.92 C55.1@232.28,5667.92 ; C56.1@795.27,5457.29 816.13,5436.42 v1(846.46,5436.42) ; C58.1@1047.24,5665.95 1060.24,5652.96 v1(1102.36,5652.96) 1118.9,5652.96 C66.1@1133.86,5667.92 ; v1(1102.36,5436.42) C68.1@1130.71,5436.42 ; C67.1@1698.82,5457.29 1727.17,5457.29 v1@1748.03,5436.42 ; C23.1@2041.34,5672.64 2106.3,5672.64 2116.14,5662.8 v1(2145.67,5662.8)
  other v1: 383.86,3713.98 433.07,3713.98 383.86,3763.19 433.07,3763.19 1751.97,5436.42
  other v2: 600.39,5780.91
+2V5/2_AUX: C33.1 R27.2 R28.1 U15.9 | length 754.6
  Top Layer w10: v1(2185.04,5505.32) 2194.88,5505.32 2215.55,5525.99 U15.9@2268.7,5525.99
  Bottom Layer w10: v1(2185.04,5505.32) 2189.96,5500.4 2226.87,5500.4 ; C33.1@2263.78,5500.4 2226.87,5500.4 ; R27.2@2696.85,5475.79 R28.1@2696.85,5416.74 2460.63,5416.74 2401.57,5475.79 2224.41,5475.79 2224.41,5497.94 2226.87,5500.4
+2V5/2_SFP: C21.1 R21.2 R23.1 U15.2 | length 1082.6
  Top Layer w11: v1(2145.67,5721.86) 2162.04,5705.49 2268.7,5705.49 U15.2@2268.7,5705.12
  Mid-Layer 5 w15: 2421.26,5764.13 2497.09,5764.13 2509.84,5751.38 2509.84,5593.9 2529.53,5574.22 v1(2618.11,5574.22)
  Mid-Layer 5 w15.75: v1(2145.67,5721.86) 2163.18,5721.86 2172.87,5712.17 2200.94,5712.17 2252.91,5764.13 2421.26,5764.13
  Bottom Layer w8: R23.1@2690.94,5554.53 2742.13,5605.71 R21.2@2742.13,5623.43
  Bottom Layer w15: v1(2618.11,5574.22) 2647.64,5544.69 R23.1@2690.94,5544.69
  Bottom Layer w18: C21.1@2041.34,5731.7 2116.14,5731.7 2125.98,5721.86 v1(2145.67,5721.86)
+2V5_AUX: 2V5_AUX.1 C18.1 C41.1 C43.1 C45.1 C47.1 C59.1 C60.1 C70.1 C71.1 C261.1 C262.1 C263.1 C264.1 C265.1 C266.1 C267.1 C268.1 C361.1 C362.1 C363.1 C364.1 C365.1 C461.1 C462.1 R15.1 R27.1 U1.AB24 U1.AC7 U1.AG9 U1.AG23 U1.D9 U1.D23 U1.G6 U1.H24 U1.J7 U1.J9 U1.J15 U1.J23 U1.L22 U1.M11 U1.M14 U1.M25 U1.N6 U1.R10 U1.T21 U1.U10 U1.V6 U1.V21 U1.V25 U1.W13 U1.W15 U1.W17 U1.Y18 U2.24 U3.24 U7.6 U8.6 U9.6 U10.6 U12.5 U12.6 | length 5640.2
  Top Layer w8: U9.6@232.94,5156.9 264.44,5156.9 v1(278.22,5170.67) ; U8.6@459.32,5156.9 490.81,5156.9 v1(504.59,5170.67) ; U7.6@675.85,5156.9 707.35,5156.9 v1(721.13,5170.67) ; U10.6@902.23,5156.9 933.73,5156.9 v1(947.51,5170.67)
  Top Layer w10: C261.1@1535.43,2975.79 v1(1574.81,2975.78)
  Top Layer w11: U3.24@137.8,5260.44 195.67,5260.44 v1(196.85,5259.26) ; U2.24@1043.31,5260.44 1091.34,5260.44 1102.36,5249.41 v1(1102.36,5229.73)
  Top Layer w12: C268.1@1744.09,2552.56 1803.15,2552.56 C361.1@1811.02,2544.69 ; v1(1889.78,3212) 1909.45,3231.67 C265.1@1909.45,3251.38 ; v1(2007.88,3487.6) 2017.72,3487.6 C263.1@2047.24,3458.08 ; C262.1@2047.24,3005.32 2076.8,3005.32 v1(2086.63,3015.15) ; C267.1@2303.15,3251.38 2303.15,3231.69 v1(2322.84,3212)
  Top Layer w14: v1(2047.24,4048.63) v1(2047.24,4078.16) C462.1@2047.24,4143.12
  Top Layer w15: C262.1@2047.24,3005.32 C264.1@2047.24,3054.53 ; R15.1@3627.95,2769.1 3681.1,2769.1
  Top Layer w18: C461.1@1338.58,2822.25 C266.1@1338.58,2887.21 ; C362.1@1338.58,3012.41 1341.34,3015.16 v1(1387.8,3015.16) ; C363.1@1342.52,2662.01 1386.61,2662.01 v1(1387.8,2660.83) ; v1(1387.8,2739.57) 1338.58,2739.57 1322.83,2755.32 1322.83,2818.31 v1(1387.8,2818.31) ; C361.1@1811.02,2546.87 v1(1811.02,2591.93) ; C365.1@1848.43,4137.21 1870.08,4115.56 v1(1870.08,4068.31) ; v1(2716.55,3841.92) 2751.74,3841.92 C364.1@2752.94,3843.12
  Top Layer w30: U12.6@3688.58,2641.15 3688.58,2696.26 v1(3692.52,2700.2) ; 3722.05,2788.78 C18.1@3722.05,2849.81 ; U12.5@3738.58,2641.15 3738.58,2697.05 v1(3741.73,2700.2)
  Mid-Layer 1 w15: v2(482.28,5780.91) 482.28,5814.22 516.57,5848.51 2703.81,5848.51 2732.04,5820.28 2732.04,5539.03 v1(2785.43,5485.64)
  Bottom Layer w8: v1(1574.81,2975.78) U1.AG9@1594.49,2995.48 ; v1(1574.81,3566.33) U1.AG23@1594.49,3546.66 ; v1(1732.29,2897.05) U1.AC7@1751.98,2916.73 ; v1(1771.66,3605.7) U1.AB24@1791.34,3586.02 ; v1(1850.39,3369.48) U1.Y18@1870.08,3349.81 ; v1(1889.78,3133.27) U1.W13@1909.45,3152.96 ; v1(1889.78,3212) U1.W15@1909.45,3231.7 ; v1(1889.78,3330.12) U1.W17@1909.45,3310.44 ; v1(1929.14,2857.68) U1.V6@1948.82,2877.37 ; v1(1929.14,3487.6) U1.V21@1948.82,3467.92 ; v1(1929.14,3645.07) U1.V25@1948.82,3625.4 ; v1(1968.51,3015.15) U1.U10@1988.19,3034.85 ; v1(2007.88,3487.6) U1.T21@2027.56,3467.92 ; U1.R10@2066.93,3034.85 v1(2086.63,3015.15) ; U1.N6@2145.68,2877.37 v1(2165.36,2857.68) ; U1.M11@2185.04,3074.22 v1(2204.73,3054.53) ; U1.M14@2185.04,3192.32 v1(2204.73,3172.63) ; U1.M25@2185.04,3625.4 v1(2204.73,3645.07) ; U1.L22@2224.41,3507.29 v1(2244.09,3526.97) ; U1.J7@2303.15,2916.74 v1(2322.84,2897.05) ; U1.J9@2303.15,2995.48 v1(2322.84,2975.78) ; U1.J15@2303.15,3231.7 v1(2322.84,3212) ; U1.J23@2303.15,3546.66 v1(2322.84,3566.33) ; U1.H24@2342.53,3586.02 v1(2362.21,3605.7) ; U1.G6@2381.89,2877.37 v1(2401.58,2857.68) ; U1.D9@2500,2995.48 v1(2519.69,2975.78) ; U1.D23@2500,3546.66 v1(2519.69,3566.33)
  Bottom Layer w10: R27.1@2736.22,5475.79 2775.59,5475.79 v1(2785.43,5485.64)
  Bottom Layer w12: v1(196.85,5259.26) 203.94,5266.34 C59.1@232.28,5266.34 ; C41.1@249.34,5212.01 249.34,5177.24 255.91,5170.67 v1(278.22,5170.67) ; C43.1@465.88,5212.01 465.88,5187.08 482.28,5170.67 v1(504.59,5170.67)
  Bottom Layer w15: C45.1@643.04,5212.01 643.04,5190.36 662.73,5170.67 v1(721.13,5170.67) ; C47.1@898.95,5212.01 933.07,5212.01 947.51,5197.58 v1(947.51,5170.67)
  Bottom Layer w18: v1(68.9,5387.21) 137.01,5387.21 C71.1@141.73,5382.49 ; v1(975.2,5465.95) 1034.65,5465.95 1047.24,5453.35 C60.1@1047.24,5382.49 ; v1(1102.36,5229.73) 1122.05,5229.73 C70.1@1133.86,5241.54
  other v1: 3692.52,2739.57 3741.73,2739.57 3692.52,2778.94 3741.73,2778.94
+2V5_SFP: 2V5_SFP.1 C4.1 C100.1 C101.1 C110.1 C111.1 CT7.1 L3.2 L4.2 R1.1 R21.1 U20.5 U20.6 | length 7779.6
  Top Layer w15: R1.1@3301.18,480.32 3301.18,507.56 3327.52,533.9
  Top Layer w18: v1(2866.14,444.1) CT7.1@2866.14,501.07 ; v1(2917.32,444.1) CT7.1@2917.32,503.59 ; v1(3021.65,505.12) C111.1@3070.87,505.12 ; v1(3021.65,770.87) C101.1@3066.93,770.87
  Top Layer w19: v1(2992.13,593.71) C110.1@3053.15,593.71 ; v1(2992.13,692.13) C100.1@3053.15,692.13
  Mid-Layer 7 w18: v1(2618.11,5617.53) 2622.05,5613.59 2805.12,5613.59 2893.7,5525.01 3503.94,5525.01 3622.05,5406.9 3976.38,5406.9 3986.22,5397.05 3986.22,5219.89 3956.69,5190.36 3956.69,4609.65 3602.36,4255.32 3602.36,3207.68 3474.41,3079.73 3474.41,2125.01 3543.31,2056.11 3543.31,849.61 3503.94,810.24 3503.94,446.27 3425,367.33 3129.92,367.33 v2(3090.55,406.7)
  Bottom Layer w10: v1(3366.14,564.18) 3368.9,566.93 3378.74,566.93
  Bottom Layer w18: v1(2618.11,5617.53) 2624.02,5623.43 2681.1,5623.43 ; 2647.64,5623.43 2681.1,5623.43 ; R21.1@2696.85,5623.43 2681.1,5623.43 ; v1(3366.14,564.18) 3366.14,526.78 3385.83,507.09 C4.1@3444.88,507.09
  other v1: 3287.4,564.18 3326.77,564.18 3287.4,603.55 3326.77,603.55 3366.14,603.55